# EAGLE board chipchestra-v01 (EAGLE 7.6.0)
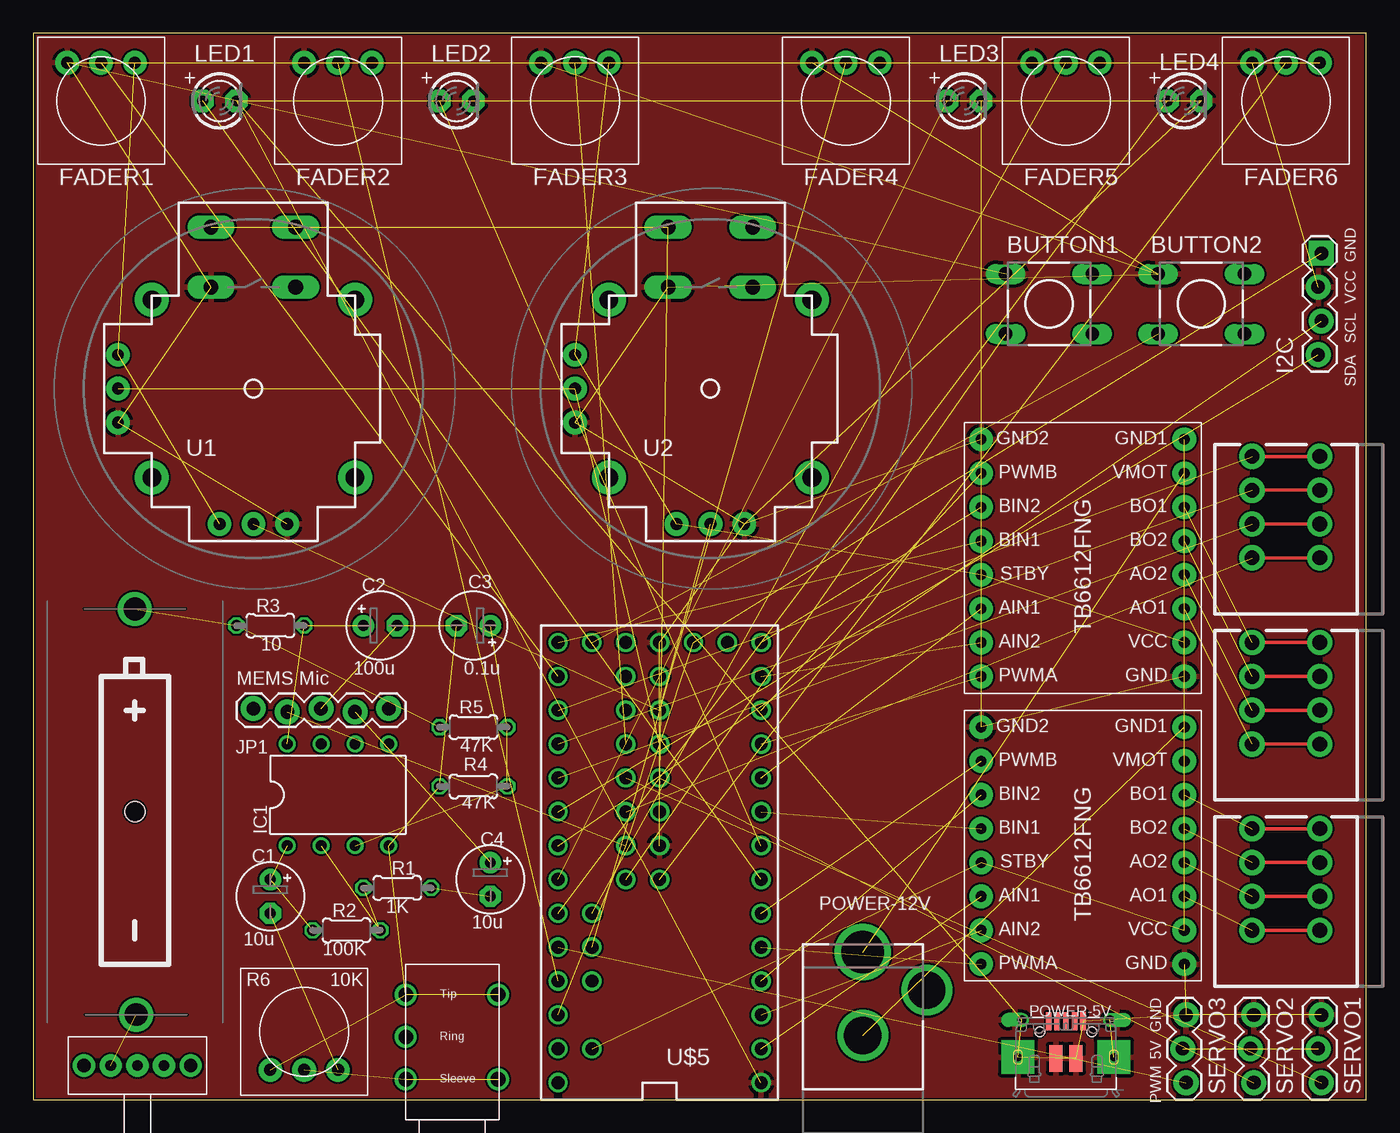
[diagram p0: board, top side]
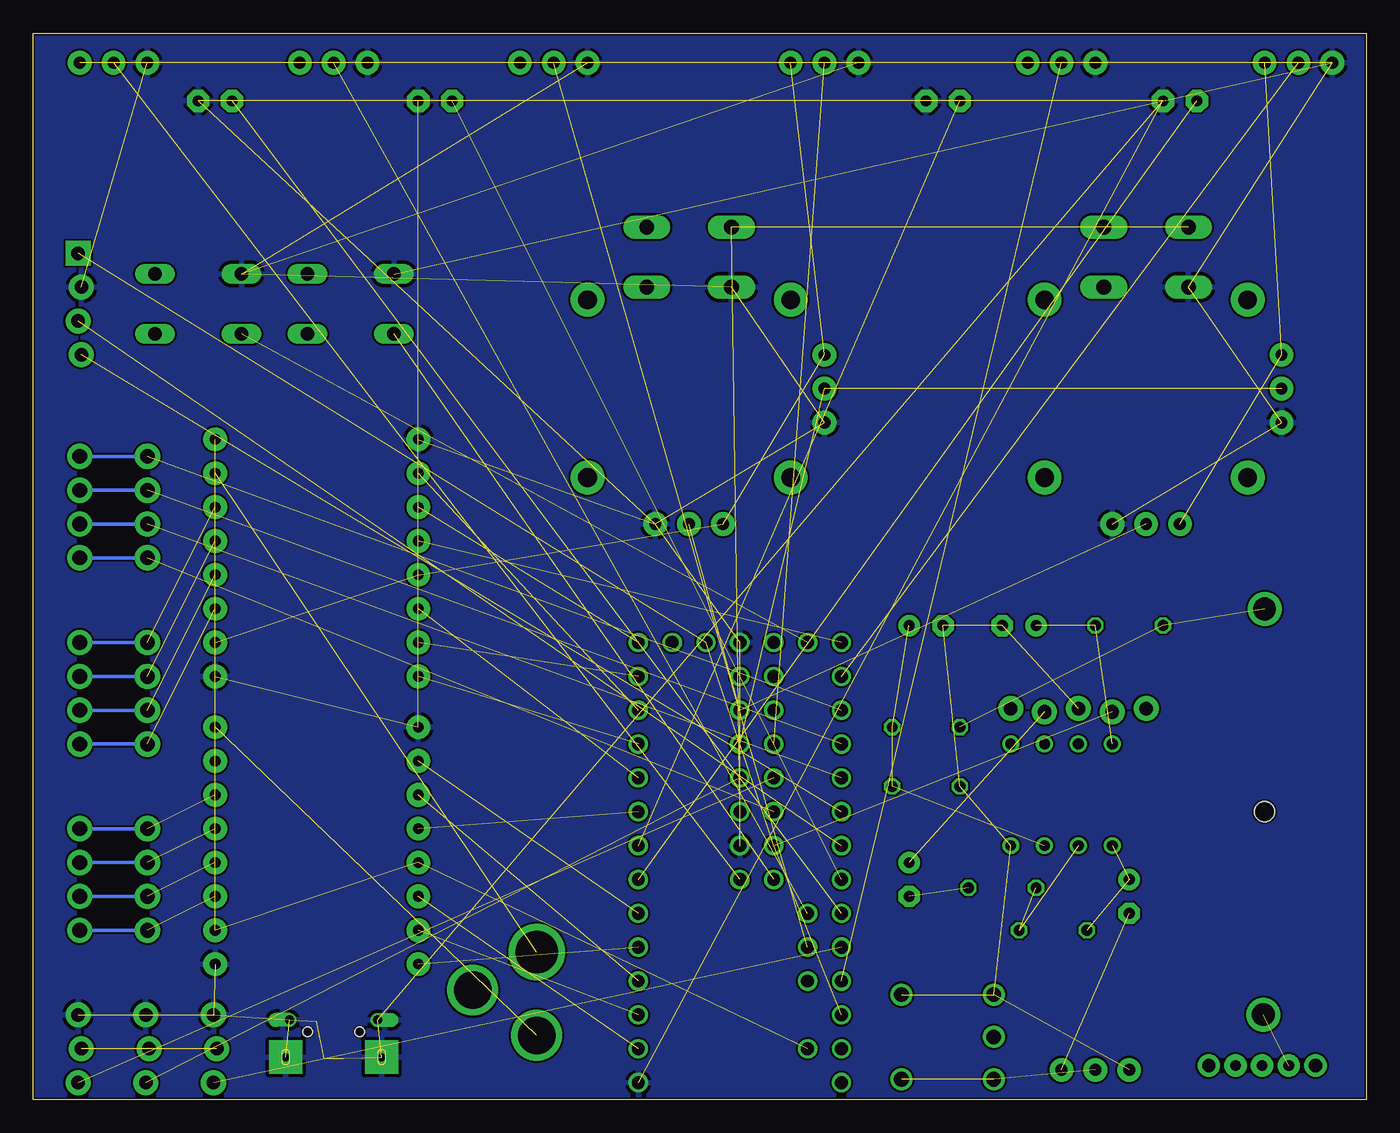
[diagram p1: board, bottom side, seen from below]

Size 100 x 80 mm. Coordinates in mm from the lower left corner, seen from the top.
Outline: 0,0 100,0 100,80 0,80 0,0
Copper layers (1*16): Top 0.035mm / dielectric 1.5mm / Bottom 0.035mm
Design rules "default *": minimum track width 6mil, minimum drill 6mil, track to track 6mil, track to pad 6mil, pad to pad 8mil, via to via 6mil, smd to smd 8mil, copper to edge 6mil, drill to drill 6mil, minimum pad ring 6mil, minimum via ring 6mil, stop-mask expansion 4mil, vias tented up to drill 0mil, thermal gap 10mil
Net classes: 0 default: width 0.152 mm, clearance 0.152 mm; 1 GND: width 0.508 mm, clearance 0.152 mm; 2 Power: width 0.508 mm, clearance 0.152 mm

## Footprints (pad centres in the part's own frame; a part is rotated, then mirrored left to right if it is on the bottom)
BATTERY-A23 = drill 1.702: GND@1 15.22,0.1; PWR@1 -15.22,0 | hole 1.524: 0,0
DTS-6 = drill 1 long: 1 -3.25,2.25; 2 3.25,2.25; 3 -3.25,-2.25; 4 3.25,-2.25
E2,5-5 = drill 0.813 pad 1.6: + -1.27,0 | drill 0.813 pad 1.6 octagon: - 1.27,0
TRIM-3386 = drill 0.9 pad 1.778: 1 -2.54,-2.857; 2 0,-2.857; 3 2.54,-2.857
1X04_LOCK = drill 1.016 pad 1.88 square: 1 0,0.127 | drill 1.016 pad 1.88: 2 2.54,-0.127; 3 5.08,0.127; 4 7.62,-0.127
DIL08 = drill 0.813 pad 1.27: 1 -3.81,-3.81; 2 -1.27,-3.81; 3 1.27,-3.81; 4 3.81,-3.81; 5 3.81,3.81; 6 1.27,3.81; 7 -1.27,3.81; 8 -3.81,3.81
1X05_LOCK = drill 1.016 pad 1.88: 1 0,0.127; 2 2.54,-0.127; 3 5.08,0.127; 4 7.62,-0.127; 5 10.16,0.127
LED3MM = drill 0.813 pad 1.676 octagon: A -1.27,0; K 1.27,0
SPRINGTERMINAL-2.54MM-4 = drill 1.1 pad 1.9: 1 7.62,-2.54; 2 5.08,-2.54; 3 2.54,-2.54; 4 0,-2.54; P$1 7.62,2.54; P$2 5.08,2.54; P$3 2.54,2.54; P$4 0,2.54
SPDT-SWITCH = drill 0.8 pad 1.676: 1 2,0; 2 4,0; 3 6,0 | drill 1 pad 1.676: P$1 0,0; P$2 8,0
4UCONN_20329 = smd 1 x 2: BASE@1 -0.75,-2; BASE@2 0.75,-2 | smd 0.4 x 1.35: D+ 0,0.775; D- -0.65,0.775; GND 1.3,0.775; ID 0.65,0.775; VBUS -1.3,0.775 | drill 0.7 offset: SPRT@1 -3.3,0.9; SPRT@2 3.3,0.9 | drill 0.6 pad 2.5 square: SPRT@3 -3.6,-1.9; SPRT@4 3.6,-1.9 | hole 0.7: -1.95,0; 1.95,0
DCJACK_2MM_PTH = drill 2.8: GND 0,7.35; GNDBREAK 4.8,10.75 | drill 3.2: PWR 0,13.6
0204/5 = drill 0.813 octagon: 1 -2.54,0; 2 2.54,0
1X03_LOCK = drill 1.016 pad 1.88: 1 0,0.127; 2 2.54,-0.127; 3 5.08,0.127
1/8"-F-STEREO-PCB = drill 1.1: RING 5.461,0; SLEEVE1 8.636,6.934; SLEEVE2 8.636,0; TIP1 2.286,6.934; TIP2 2.286,0
JOYSTICK = drill 1.1 pad 1.778 long: B1A -3.175,12.12; B1B 3.175,12.12; B2A -3.175,7.62; B2B 3.175,7.62 | drill 0.889 pad 1.778: H1 -2.54,-10.16; H2 0,-10.16; H3 2.54,-10.16; V1 -10.16,2.54; V2 -10.16,0; V3 -10.16,-2.54 | drill 1.397 pad 2.54: MOUNT1 -7.62,6.668; MOUNT2 -7.62,-6.668; MOUNT3 7.62,-6.668; MOUNT4 7.62,6.668
TEENSY_3.0-3.2_ALL_PINS_&_PADS = drill 0.965: 0 -7.62,13.97; 1 -7.62,11.43; 2 -7.62,8.89; 3 -7.62,6.35; 3.3V 7.62,11.43; 3.3V1 -2.54,-16.51; 3.3V2 2.54,-1.27; 4 -7.62,3.81; 5 -7.62,1.27; 6 -7.62,-1.27; 7 -7.62,-3.81; 8 -7.62,-6.35; 9 -7.62,-8.89; 10 -7.62,-11.43; 11 -7.62,-13.97; 12 -7.62,-16.51; 13 7.62,-16.51; 14/A0 7.62,-13.97; 15/A1 7.62,-11.43; 16/A2 7.62,-8.89; 17/A3 7.62,-6.35; 18/A4 7.62,-3.81; 19/A5 7.62,-1.27; 20/A6 7.62,1.27; 21/A7 7.62,3.81; 22/A8 7.62,6.35; 23/A9 7.62,8.89; 24 0,-3.81; 25 0,-6.35; 26 0,-8.89; 27 0,-11.43; 28 0,-13.97; 29 2.54,-13.97; 30 2.54,-11.43; 31 2.54,-8.89; 32 2.54,-6.35; 33 2.54,-3.81; A10 5.08,6.35; A11 5.08,3.81; A12 0,1.27; A13 2.54,1.27; AGND 7.62,13.97; AREF 5.08,8.89; GND -7.62,16.51; GND1 0,-16.51; GND2 0,-1.27; PGM 2.54,-16.51; RESET/DAC 5.08,-16.51; VBAT -5.08,-16.51; VIN 7.62,16.51; VUSB 5.08,13.97
POLOLU_TB6612FNG = drill 0.8 pad 1.778: AIN1 7.62,3.81; AIN2 7.62,6.35; AO1 -7.62,3.81; AO2 -7.62,1.27; BIN1 7.62,-1.27; BIN2 7.62,-3.81; BO1 -7.62,-3.81; BO2 -7.62,-1.27; GND -7.62,8.89; GND1 -7.62,-8.89; GND2 7.62,-8.89; PWMA 7.62,8.89; PWMB 7.62,-6.35; STBY 7.62,1.27; VCC -7.62,6.35; VMOT -7.62,-6.35

## Placement (x,y rotation side)
BAT1  [BATTERY-A23]  7.62,21.59 270 top
BUTTON1  DTS-6  [DTS-6]  76.2,59.69 0 top
BUTTON2  DTS-6  [DTS-6]  87.63,59.69 0 top
C1  10u  [E2,5-5]  17.78,15.24 270 top
C2  100u  [E2,5-5]  26.04,35.56 0 top
C3  0.1u  [E2,5-5]  33.02,35.56 180 top
C4  10u  [E2,5-5]  34.29,16.51 270 top
FADER1  [TRIM-3386]  5.08,74.93 180 top
FADER2  [TRIM-3386]  22.86,74.93 180 top
FADER3  [TRIM-3386]  40.64,74.93 180 top
FADER4  [TRIM-3386]  60.96,74.93 180 top
FADER5  [TRIM-3386]  77.47,74.93 180 top
FADER6  [TRIM-3386]  93.98,74.93 180 top
I2C  [1X04_LOCK]  96.52,63.5 270 top
IC1  OPA2134PA  [DIL08]  22.86,22.86 0 top
JP1  MEMS Mic  [1X05_LOCK]  16.51,29.21 0 top
LED1  [LED3MM]  13.97,74.93 0 top
LED2  [LED3MM]  31.75,74.93 0 top
LED3  [LED3MM]  69.85,74.93 0 top
LED4  [LED3MM]  86.36,74.93 0 top
MOTORS1  [SPRINGTERMINAL-2.54MM-4]  93.98,12.7 90 top
MOTORS2  [SPRINGTERMINAL-2.54MM-4]  93.98,26.67 90 top
ON/OFF  labl  [SPDT-SWITCH]  3.81,2.54 0 top
POWER-5V  [4UCONN_20329]  77.47,5.08 0 top
POWER-12V  [DCJACK_2MM_PTH]  62.23,-2.54 0 top
R1  1K  [0204/5]  27.3,15.88 180 top
R2  100K  [0204/5]  23.5,12.7 180 top
R3  10  [0204/5]  17.78,35.56 180 top
R4  47K  [0204/5]  33.02,23.5 0 top
R5  47K  [0204/5]  33.02,27.94 180 top
R6  10K  [TRIM-3386]  20.32,5.08 0 top
SERVO1  [1X03_LOCK]  96.52,6.35 270 top
SERVO2  [1X03_LOCK]  91.44,6.35 270 top
SERVO3  [1X03_LOCK]  86.36,6.35 270 top
TO-AUDIO-IO  1/8"-F-STEREO-PCB  [1/8"-F-STEREO-PCB]  27.94,10.16 270 top
TOUCH  [SPRINGTERMINAL-2.54MM-4]  93.98,40.64 90 top
U1  JOYSTICKPTH  [JOYSTICK]  16.51,53.34 0 top
U2  JOYSTICKPTH  [JOYSTICK]  50.8,53.34 0 top
U$5  TEENSY_3.1-3.2_ALL_PINS&PADS  [TEENSY_3.0-3.2_ALL_PINS_&_PADS]  46.99,17.78 180 top
U$6  POLOLU_TB6612FNG  [POLOLU_TB6612FNG]  78.74,40.64 180 top
U$7  POLOLU_TB6612FNG  [POLOLU_TB6612FNG]  78.74,19.05 180 top

## Library data of the parts
BAT1 ON/OFF = Daniel
BUTTON1 BUTTON2 = switch-tact
C1-C4 = rcl
FADER1-FADER6 LED1-LED4 POWER-12V R6 U1 U2 = adafruit
I2C = CMU-ArtFab; GND: GND; SCL: SCL; SDA: SDA; VCC: VCC
IC1 = linear; IC_NAME: TL072
JP1 = SparkFun-Connectors; CON1: Vin; CON2: 3V; CON3: GND; CON4: AC; CON5: DC
MOTORS1 MOTORS2 R1-R5 TOUCH U$6 U$7 = CMU-ArtFab
POWER-5V = microbuilder
SERVO1 SERVO2 = SparkFun-Connectors
SERVO3 = SparkFun-Connectors; 5V: 5V; GND: GND; PWM: PWM
TO-AUDIO-IO = CMU-ArtFab; TO-AUDIO-IO: TO-AUDIO-IO
U$5 = Teensy_3_and_LC_Series_Boards_v1.4

## Nets
+3V3: I2C.1 JP1.2 U$5.3.3V U$5.3.3V1 U$5.3.3V2
+5V: FADER1.1 FADER2.1 FADER3.1 FADER4.1 FADER5.1 FADER6.1 U1.H1 U1.V1 U2.H1 U2.V1 U$5.VUSB U$6.STBY U$6.VCC U$7.STBY U$7.VCC
ANALOG1: FADER1.2 U$5.14/A0
ANALOG2: FADER2.2 U$5.23/A9
ANALOG3: FADER3.2 U$5.31
ANALOG4: FADER4.2 U$5.A10
ANALOG5: FADER5.2 U$5.A11
ANALOG6: FADER6.2 U$5.A12
BUTTON1: BUTTON1.3 U$5.A13
BUTTON2: BUTTON2.3 U$5.RESET/DAC
GND: BUTTON1.1 BUTTON2.1 FADER1.3 FADER2.3 FADER3.3 FADER4.3 FADER5.3 FADER6.3 I2C.2 LED1.K LED2.K LED3.K LED4.K POWER-5V.BASE@1 POWER-5V.BASE@2 POWER-5V.GND POWER-5V.SPRT@1 POWER-5V.SPRT@2 POWER-5V.SPRT@3 POWER-5V.SPRT@4 SERVO1.1 SERVO2.1 SERVO3.1 U1.B2A U1.H3 U1.V3 U2.B2A U2.H3 U2.V3 U$5.GND U$5.GND1 U$5.GND2 U$6.GND U$6.GND2 U$7.GND U$7.GND2
GND_MIC: C2.- C3.- IC1.4 JP1.3 R4.1 R6.1 TO-AUDIO-IO.TIP1 TO-AUDIO-IO.TIP2
GND_MOT [Power]: POWER-12V.GND U$6.GND1 U$7.GND1
GNDBREAK: POWER-12V.GNDBREAK
I2C_SCL0: I2C.3 U$5.19/A5
I2C_SDA0: I2C.4 U$5.18/A4
JOYB1: U1.B1A U2.B1A U$5.24
JOYB2: U$5.30
JOYH1: U1.H2 U2.H2 U$5.27
JOYH2: U$5.29
JOYV1: U1.V2 U2.V2 U$5.26
JOYV2: U$5.28
LED1: LED1.A U$5.5
LED2: LED2.A U$5.6
LED3: LED3.A U$5.20/A6
LED4: LED4.A U$5.21/A7
MOT_AIN1_1: U$5.0 U$7.AIN1
MOT_AIN1_2: U$5.8 U$6.AIN1
MOT_AIN2_1: U$5.1 U$7.AIN2
MOT_AIN2_2: U$5.11 U$6.AIN2
MOT_BIN1_1: U$5.7 U$7.BIN1
MOT_BIN1_2: U$5.13 U$6.BIN1
MOT_BIN2_1: U$5.2 U$7.BIN2
MOT_BIN2_2: U$5.12 U$6.BIN2
MOT_PWMA_1: U$5.3 U$7.PWMA
MOT_PWMA_2: U$5.9 U$6.PWMA
MOT_PWMB_1: U$5.4 U$7.PWMB
MOT_PWMB_2: U$5.10 U$6.PWMB
N$1: C2.+ IC1.8 R3.1
N$2: BAT1.GND@1 ON/OFF.1
N$3: C4.+ JP1.4
N$4: C4.- R1.1
N$5: IC1.2 R1.2 R2.1
N$6: C1.- R6.3
N$7: R6.2 TO-AUDIO-IO.SLEEVE1 TO-AUDIO-IO.SLEEVE2
N$8: C3.+ IC1.3 R4.2 R5.1
N$9: C1.+ IC1.1 R2.2
N$10: U$5.VBAT
N$13: ON/OFF.2
N$14 [Power]: POWER-5V.VBUS
N$45 [Power]: MOTORS1.P$1 U$7.BO1
N$46 [Power]: MOTORS1.P$2 U$7.BO2
N$48: U$5.VIN
N$52 [Power]: MOTORS1.P$3 U$7.AO2
N$53: U$5.PGM
N$54 [Power]: MOTORS1.P$4 U$7.AO1
N$55: U$5.AREF
N$56: U$5.AGND
N$57 [Power]: MOTORS2.P$1 U$6.BO1
N$63 [Power]: MOTORS2.P$2 U$6.BO2
N$64 [Power]: MOTORS2.P$3 U$6.AO2
N$65 [Power]: MOTORS2.P$4 U$6.AO1
SERVO1: SERVO3.3 U$5.22/A8
SERVO2: SERVO2.3 U$5.25
SERVO3: SERVO1.3 U$5.32
TOUCH1: TOUCH.P$1 U$5.15/A1
TOUCH2: TOUCH.P$2 U$5.16/A2
TOUCH3: TOUCH.P$3 U$5.17/A3
TOUCH4: TOUCH.P$4 U$5.33
V+ [Power]: U$7.VMOT
VBAT [Power]: SERVO1.2 SERVO2.2 SERVO3.2
VMIC: BAT1.PWR@1 R3.2 R5.2
VMOT [Power]: POWER-12V.PWR U$6.VMOT

## Tracks (layer width: path | path; a pad name or v marks a point on that pad's centre or on a via)
+3V3  (4 unrouted)
+5V  (14 unrouted)
ANALOG1  (1 unrouted)
ANALOG2  (1 unrouted)
ANALOG3  (1 unrouted)
ANALOG4  (1 unrouted)
ANALOG5  (1 unrouted)
ANALOG6  (1 unrouted)
BUTTON1  (1 unrouted)
BUTTON2  (1 unrouted)
GND  (35 unrouted)
  pour Bottom: 0,0 100.33,0 100.33,80.01 0,80.01
  pour Top: 0,0 100.33,0 100.33,80.01 0,80.01
GND_MIC  (7 unrouted)
GND_MOT  (2 unrouted)
I2C_SCL0  (1 unrouted)
I2C_SDA0  (1 unrouted)
JOYB1  (2 unrouted)
JOYH1  (2 unrouted)
JOYV1  (2 unrouted)
LED1  (1 unrouted)
LED2  (1 unrouted)
LED3  (1 unrouted)
LED4  (1 unrouted)
MOT_AIN1_1  (1 unrouted)
MOT_AIN1_2  (1 unrouted)
MOT_AIN2_1  (1 unrouted)
MOT_AIN2_2  (1 unrouted)
MOT_BIN1_1  (1 unrouted)
MOT_BIN1_2  (1 unrouted)
MOT_BIN2_1  (1 unrouted)
MOT_BIN2_2  (1 unrouted)
MOT_PWMA_1  (1 unrouted)
MOT_PWMA_2  (1 unrouted)
MOT_PWMB_1  (1 unrouted)
MOT_PWMB_2  (1 unrouted)
N$1  (2 unrouted)
N$2  (1 unrouted)
N$3  (1 unrouted)
N$4  (1 unrouted)
N$5  (2 unrouted)
N$6  (1 unrouted)
N$7  (2 unrouted)
N$8  (3 unrouted)
N$9  (2 unrouted)
N$45  (1 unrouted)
N$46  (1 unrouted)
N$52  (1 unrouted)
N$54  (1 unrouted)
N$57  (1 unrouted)
N$63  (1 unrouted)
N$64  (1 unrouted)
N$65  (1 unrouted)
SERVO1  (1 unrouted)
SERVO2  (1 unrouted)
SERVO3  (1 unrouted)
TOUCH1  (1 unrouted)
TOUCH2  (1 unrouted)
TOUCH3  (1 unrouted)
TOUCH4  (1 unrouted)
VBAT  (2 unrouted)
VMIC  (2 unrouted)
VMOT  (1 unrouted)